# Altium PCB MainBoard V03.PcbDoc
Units mm, origin at the board's own origin, x right, y up, seen from the top; angles counter-clockwise.
Board outline 43 x 30 mm, 2 copper layers (Top Layer, Bottom Layer), stack 1.071 mm thick; 35 components, 48 nets, 166 pads, 86 vias.
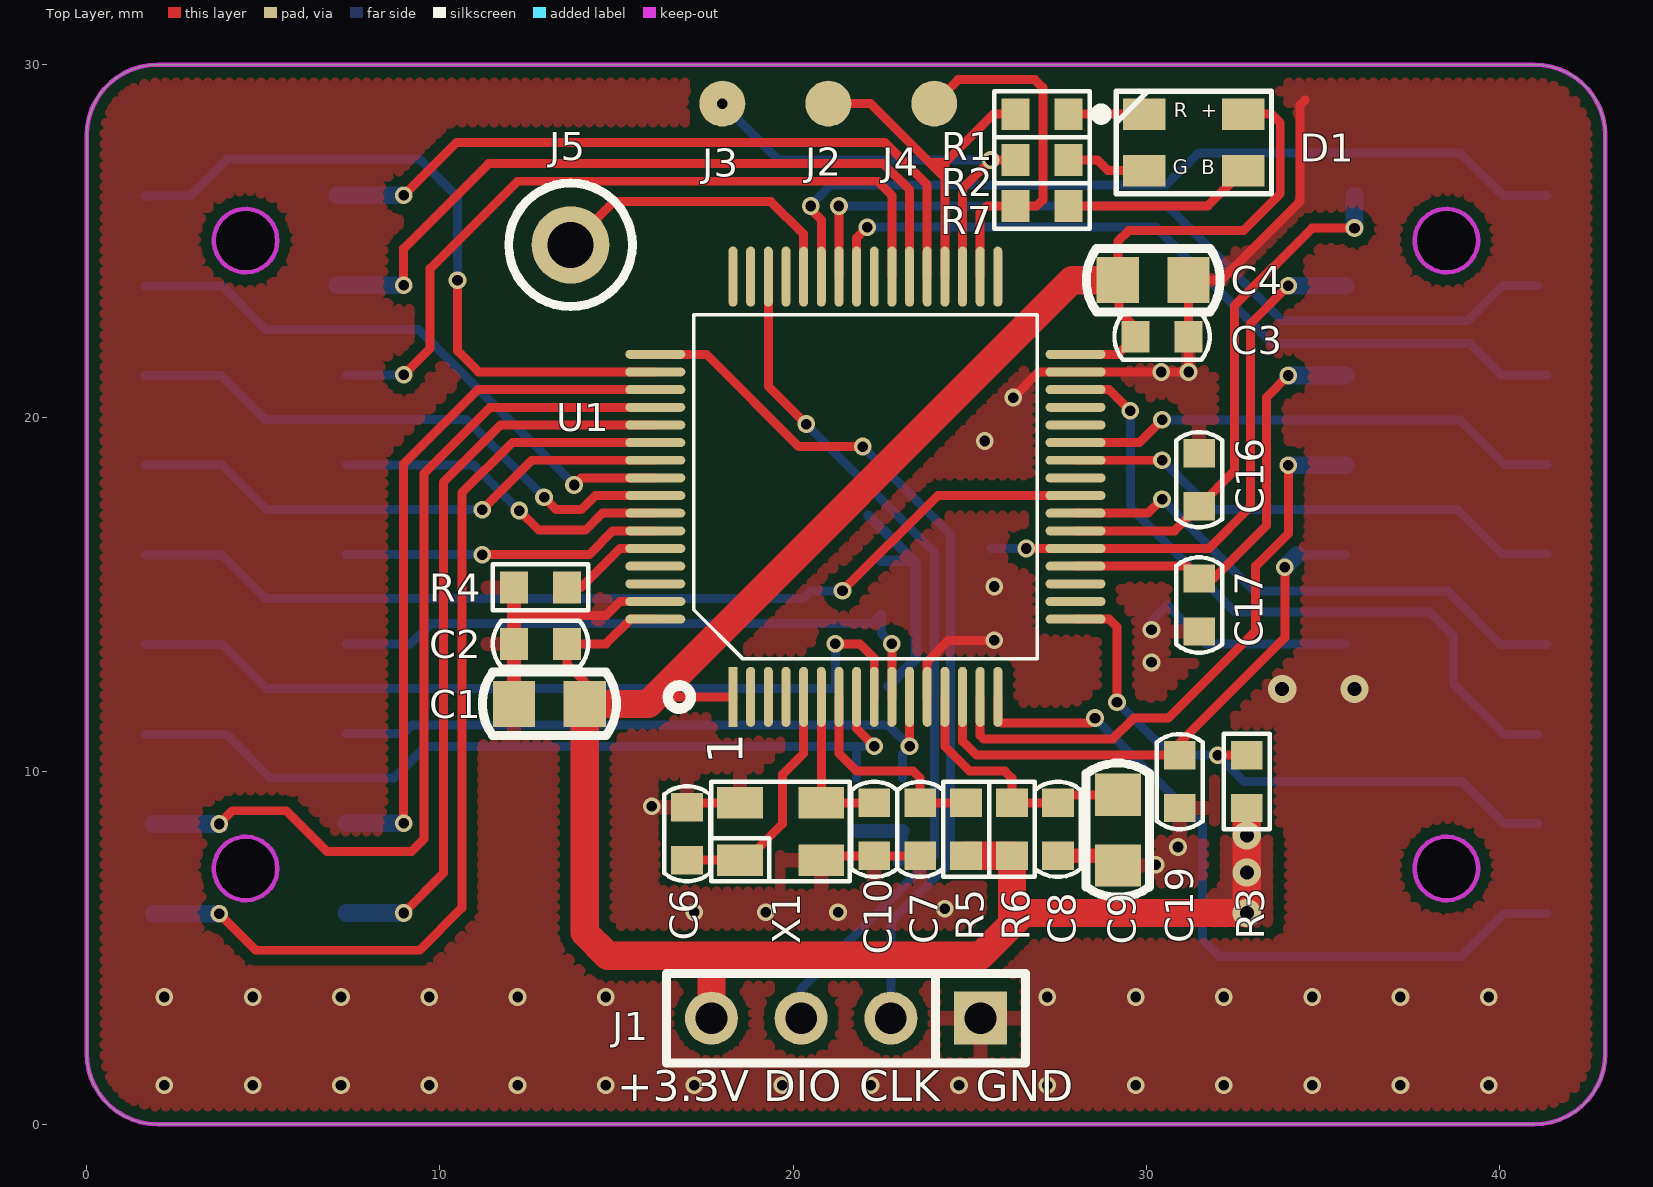
[diagram p0: Top Layer view]
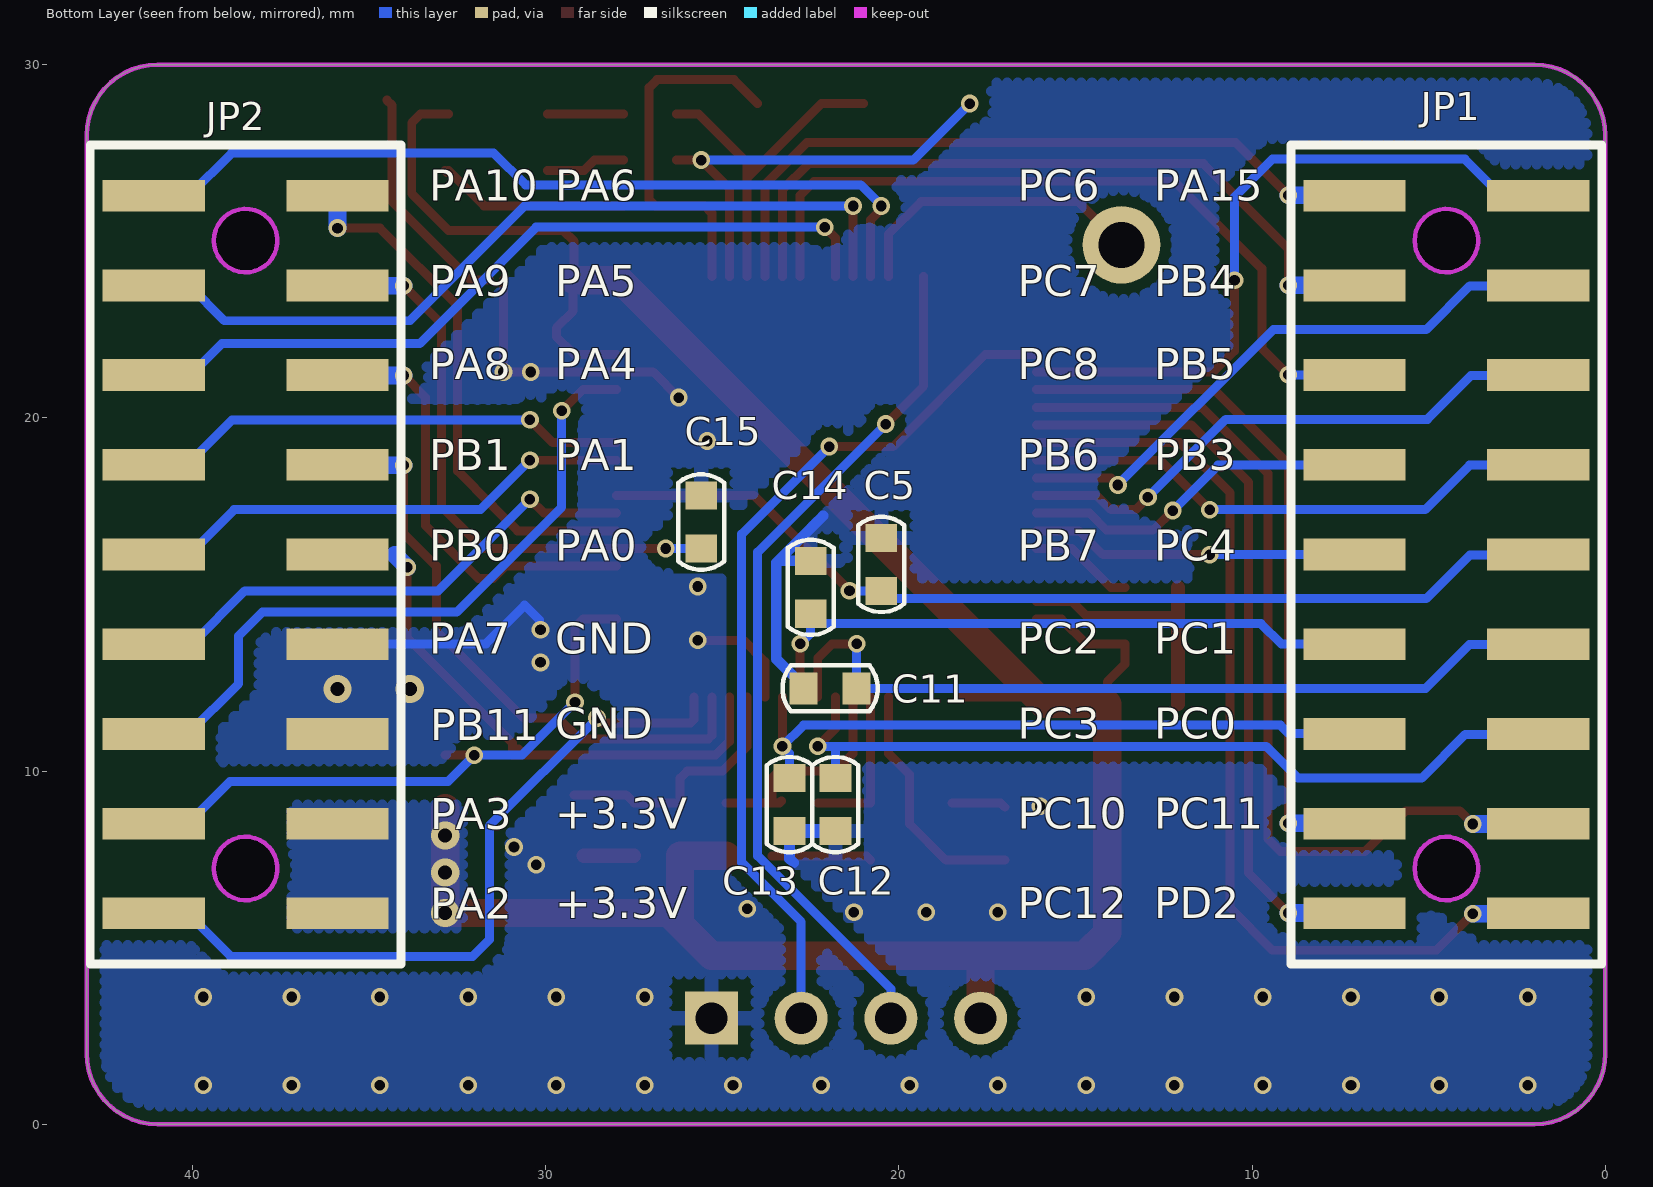
[diagram p1: Bottom Layer view, seen from below]

## Layer stack, top to bottom
Top Layer: signal copper 0.0356
Dielectric: core 1, FR-4, Dk 4.8
Bottom Layer: signal copper 0.0356

## Board outline
0,2 0,28 cw(c2,28) 2,30 41,30 cw(c41,28) 43,28 43,2 cw(c41,2) 41,0 2,0 cw(c2,2)

## Design rules (kind name [scope] priority, off if disabled: settings)
Clearance Clearance_1 [InPolygon] p1: gap=0.3
Clearance [All] p2: gap=0.2
ComponentClearance [All] p1 off: gap=0.254 collisioncheckmode=3 verticalgap=0.254 showdistances=FALSE
Height [All] p1 off: minheight=0 maxheight=25.4 prefheight=12.7
HoleToHoleClearance [All] p1 off: gap=0.254 allowstackedmicrovias=TRUE
LayerPairs [All] p1 off: enforce=TRUE
MinimumSolderMaskSliver [All] p1 off: minsoldermaskwidth=0.254
NetAntennae [All] p1 off: netantennaetolerance=0
PolygonConnect PolygonConnect_1 [(HasFootprint('0603C') OR HasFootprint('0603R') OR HasFootprint('0805C') OR HasFootprint('HEADER 9X2-MIRROR') OR HasFootprint('LQFP-64') OR HasFootprint('SIP4') OR HasFootprint('Y3225'))] p1: connectstyle=Relief reliefconductorwidth=0.4 reliefentries=4 polygonreliefangle="90 Angle" airgapwidth=0.35
PolygonConnect [All] p2: connectstyle=Direct reliefconductorwidth=0.254 reliefentries=4 polygonreliefangle="90 Angle" airgapwidth=0.254
RoutingVias [All] p1: holewidth=0.3 width=0.5 viastyle="Through Hole" minholewidth=0.3 minwidth=0.5 maxholewidth=0.711 maxwidth=1.27
SilkToSilkClearance [All] p1 off: silktosilkclearance=0.254
SilkToSolderMaskClearance [IsPad] p1 off: minsilkscreentomaskgap=0.254 clearancetoexposedcopper=TRUE
SolderMaskExpansion [All] p1: expansion=0.102
Width [All] p1: maxlimit=2 minlimit=0.2 preferedwidth=0.2
20 further rules are at their usual default settings.

## Components (designator, comment, footprint, x,y, rotation, side; value= is the part's Value field where it differs from the comment)
C1 "4.7UF" 0805C 13.1,11.9 r180 top
C2 "100NF" 0603C 12.85,13.6 r180 top
C3 "100NF" 0603C 30.45,22.3 r0 top
C4 "4.7UF" 0805C 30.2,23.9 r0 top
C5 "NC" 0603C 20.5,15.85 r90 bottom
C6 "12pF" 0603C 17,8.224 r270 top
C7 "100NF" 0603C 23.6,8.35 r90 top
C8 "100NF" 0603C 27.5,8.35 r270 top
C9 "4.7UF" 0805C 29.2,8.325 r270 top
C10 "12pF" 0603C 22.3,8.35 r90 top
C11 "NC" 0603C 21.95,12.34 r0 bottom
C12 "NC" 0603C 21.8,9.05 r270 bottom
C13 "1NF" 0603C 23.1,9.05 r270 bottom
C14 "NC" 0603C 22.5,15.2 r90 bottom
C15 "NC" 0603C 25.6,17.05 r90 bottom
C16 "NC" 0603C 31.5,18.25 r90 top
C17 "NC" 0603C 31.5,14.7 r270 top
C19 "NC" 0603C 30.95,9.7 r270 top
D1 "LED_3528" LED3528 31.35,27.8 r0 top
J1 "SWD" SIP4 25.31,3 r180 top
J2 "" TPJ1.3A 21,28.9 r0 top
J3 "" TPJ1.3A 18,28.9 r0 top
J4 "" TPJ1.3A 24,28.9 r0 top
J5 "" PLUG 13.7,24.9 r0 top
JP1 "HEADER 9X2" SMT2.54-2X9-M-MIRROR 4.5,16.13 r180 bottom
JP2 "HEADER 9X2" SMT2.54-2X9-M-MIRROR 38.5,16.13 r180 bottom locked
R1 "1K" 0603R 27.05,28.6 r180 top
R2 "1K" 0603R 27.05,27.3 r180 top
R3 "10K" 0603R 32.85,9.7 r270 top
R4 "10K" 0603R 12.85,15.2 r180 top
R5 "10K" 0603R 24.9,8.35 r270 top
R6 "51R" 0603R 26.2,8.35 r90 top
R7 "1K" 0603R 27.05,26 r180 top
U1 "STM32F051R8T6" LQFP-64 18.3,12.1 r90 top
X1 "16MHz" Y3225 18.5,7.474 r90 top

## Footprints (in the part's own frame and the unit in brackets; to place one, negate y for a bottom-side part, rotate by r counter-clockwise, add the part's x,y. Pads: shape width x height; smd on the part's side, far side on the other; paste and mask are expansions set on the pad)
0603C [mm]
  rect 0.8x0.9 smd: 1(-0.75,0) 2(0.75,0)
  silkscreen extent -1.35,-0.65 1.35,0.65, body extent -0.8,-0.4 0.8,0.4, height 0.3
0603R [mm]
  rect 0.8x0.9 smd: 1(-0.75,0) 2(0.75,0)
  silkscreen extent -1.35,-0.65 1.35,0.65, body extent -0.8,-0.4 0.8,0.4, height 0.45
0805C [mm]
  rect 1.2x1.3 smd: 1(-1,0) 2(1,0)
  silkscreen extent -1.9,-0.9 1.9,0.9, body extent -1,-0.62 1,0.63, height 0.78
LED3528 [mm]
  rect 1.2x0.9 smd: 1(-1.4,0.8) 2(1.4,0.8) 3(1.4,-0.8) 4(-1.4,-0.8)
  silkscreen extent -2.72,-1.45 2.2,1.45, body extent -1.5,-1.25 1.5,1.25, height 1.1
LQFP-64 [mm]
  rect 1.7x0.254 smd: 1(0,0)
  oval 1.7x0.254 smd: 2(0,-0.5) 3(0,-1) 4(0,-1.5) 5(0,-2) 6(0,-2.5) 7(0,-3) 8(0,-3.5) 9(0,-4) 10(0,-4.5) 11(0,-5) 12(0,-5.5) 13(0,-6) 14(0,-6.5) 15(0,-7) 16(0,-7.5) 33(11.9,-7.5) 34(11.9,-7) 35(11.9,-6.5) 36(11.9,-6) 37(11.9,-5.5) 38(11.9,-5) 39(11.9,-4.5) 40(11.9,-4) 41(11.9,-3.5) 42(11.9,-3) 43(11.9,-2.5) 44(11.9,-2) 45(11.9,-1.5) 46(11.9,-1) 47(11.9,-0.5) 48(11.9,0)
  oval 0.254x1.7 smd: 17(2.2,-9.7) 18(2.7,-9.7) 19(3.2,-9.7) 20(3.7,-9.7) 21(4.2,-9.7) 22(4.7,-9.7) 23(5.2,-9.7) 24(5.7,-9.7) 25(6.2,-9.7) 26(6.7,-9.7) 27(7.2,-9.7) 28(7.7,-9.7) 29(8.2,-9.7) 30(8.7,-9.7) 31(9.2,-9.7) 32(9.7,-9.7) 49(9.7,2.2) 50(9.2,2.2) 51(8.7,2.2) 52(8.2,2.2) 53(7.7,2.2) 54(7.2,2.2) 55(6.7,2.2) 56(6.2,2.2) 57(5.7,2.2) 58(5.2,2.2) 59(4.7,2.2) 60(4.2,2.2) 61(3.7,2.2) 62(3.2,2.2) 63(2.7,2.2) 64(2.2,2.2)
  silkscreen extent 1.09,-8.61 10.81,1.12, body extent -0.04,-9.76 11.96,2.24, height 1.56
PLUG [mm]
  round 2.2 hole 1.3: 1(0,0)
  silkscreen extent -1.75,-1.75 1.75,1.75, body extent -1.28,-1.27 1.26,1.27, height 4.89
SIP4 [mm]
  rect 1.5x1.5 hole 0.9: 1(0,0)
  round 1.5 hole 0.9: 2(2.54,0) 3(5.08,0) 4(7.62,0)
  silkscreen extent -1.27,-1.27 8.89,1.27, body extent -1.27,-1.27 8.89,1.27, height 8.54
SMT2.54-2X9-M-MIRROR [mm]
  rect 2.9x0.9 smd: 1(2.6,10.16) 2(-2.6,10.16) 3(2.6,7.62) 4(-2.6,7.62) 5(2.6,5.08) 6(-2.6,5.08) 7(2.6,2.54) 8(-2.6,2.54) 9(2.6,0) 10(-2.6,0) 11(2.6,-2.54) 12(-2.6,-2.54) 13(2.6,-5.08) 14(-2.6,-5.08) 15(2.6,-7.62) 16(-2.6,-7.62) 17(2.6,-10.16) 18(-2.6,-10.16)
  Keep-Out Layer circle w0.127: c0,-8.89 r0.9
  Keep-Out Layer circle w0.127: c0,8.89 r0.9
  Keep-Out Layer board cut-out: -0.9,-8.89 -0.831,-9.234 -0.636,-9.526 -0.344,-9.721 0,-9.79 0,-9.79 0.344,-9.721 0.636,-9.526 0.831,-9.234 0.9,-8.89 0.9,-8.89 0.831,-8.546 0.636,-8.254 0.344,-8.059 0,-7.99 0,-7.99 -0.344,-8.059 -0.636,-8.254 -0.831,-8.546 -0.9,-8.89
  Keep-Out Layer board cut-out: -0.9,8.89 -0.779,9.34 -0.45,9.669 0,9.79 0,9.79 0.344,9.721 0.636,9.526 0.831,9.234 0.9,8.89 0.9,8.89 0.831,8.546 0.636,8.254 0.344,8.059 0,7.99 0,7.99 -0.344,8.059 -0.636,8.254 -0.831,8.546 -0.9,8.89
  silkscreen extent -4.4,-11.6 4.4,11.6, body extent -3.57,-11.48 3.43,11.38, height 9.66
TPJ1.3A [mm]
  round 1.3 smd: 1(0,0)
Y3225 [mm]
  rect 0.9x1.3 smd: 1(0,0) 2(0,-2.3) 3(1.626,-2.3) 4(1.626,0)
  silkscreen extent -0.6,-3.11 2.23,0.81, body extent -0.42,-2.75 2.08,0.45, height 0.81

## Part data
C1 C4: library part "CAP NP"
C2 C3 C5 C8 C9 C11 C12 C13 C14 C15 C16 C17 C19: library part CAP, "Y02-02238"
C6 C10: library part CAP, "Capacitor"
C7: library part "CAP NP", "Y02-02238"
J1: library part CON4, "Connector"
J2 J3 J4 J5: library part Socket, "Plug"
R1 R2 R7: library part RES, "Y02-00493"
R3: library part RES
R4 R5 R6: library part RES, "Y02-01715"
X1: library part CON4A_1

## Via types
v1: diameter 0.5, hole 0.3, Top Layer to Bottom Layer, tented both sides, 81 vias
v2: diameter 0.8, hole 0.4, Top Layer to Bottom Layer, tented both sides, 5 vias

## Nets (pads, with @x,y where several pads share a name; then routed paths per layer and width w, separated by ;. In a path a pad name is that pad's centre, name@x,y a point inside that pad or via, vN(x,y) a via of type N, cw(c..) or ccw(c..) an arc to the next point about the centre after c; other vN are vias at no path point)
+3.3V: C1.1 C2.1 C3.1 C4.1 D1.2 J1.4 JP2.15 JP2.17 R3.2 R5.2 R6.1 U1.1 U1.32 U1.64 | length 74.1
  Top Layer w0.254: C1.1 14.1,12.525 13.6,13.025 C2.1 14.7,13.6 15.4,14.3 U1.64 ; 16.1,12.1 U1.1 ; U1.32 29.2,21.8 C3.1 29.7,22.55 29.225,23.025 29.225,23.875 C4.1 29.2,25 29.5,25.3 32.75,25.3 33.796,26.346 33.796,28.354 33.55,28.6 D1.2
  Top Layer w0.8: J1.4 17.69,4.77 ; R5.2 R6.1 26.2,5.66 ; C4.1 27.9,23.9 15.9,11.9 C1.1 14.1,5.425 14.755,4.77 25.31,4.77 26.2,5.66 ; v2@32.85,5.97 R3.2 ; v2(32.85,5.98) 32.3,5.98 26.52,5.98 26.2,5.66
  other v2: 32.85,7.125 32.85,8.175
GND: C1.2 C2.2 C3.2 C4.2 C5.2 C6.1 C7.1 C8.2 C9.2 C10.1 C11.2 C12.2 C13.2 C14.2 C15.2 C16.2 C17.2 C19.2 J1.1 JP2.11 JP2.13 R4.2 U1.12 U1.31 U1.63 X1.2 X1.4 | length 47.2
  Top Layer w0.254: 12.1,14.4 14.7,14.4 15.1,14.8 U1.63 ; C6.1 17.126,9.1 X1.4 ; X1.2 20.926,7.6 C10.1 C7.1 ; U1.12 23.8,13.1 24.4,13.7 v1(25.7,13.7) ; v1(26.235,20.575) 26.96,21.3 U1.31 v1(31.2,21.3) ; C3.2 v1(31.2,21.3) ; C4.2 v1(31.2,21.3) ; C4.2@31.6,23.9 32.125,23.9 34.35,26.125 34.35,28.85 34.5,29
  Top Layer w0.4: C1.2 12.1,14.4 R4.2 ; C8.2 28.8,7.6 C9.2@28.925,7.6
  Bottom Layer w0.254: v1@30.175,14 30.175,14.275 30.6,14.7 31.7,13.6 JP2.11@35.65,13.6
  Bottom Layer w0.3: 22.149,17.224 23.473,15.9 23.473,13.173 C11.2@22.7,12.4 ; C14.2 23.423,15.95 ; 22.984,7.4 23.1,7.516 C13.2
  Bottom Layer w0.4: C12.2 C13.2
  other v1: 2.2,1.1 4.7,1.1 7.2,1.1 9.7,1.1 12.2,1.1 14.7,1.1 17.2,1.1 19.7,1.1 22.2,1.1 24.7,1.1 27.2,1.1 29.7,1.1 32.2,1.1 34.7,1.1 37.2,1.1 39.7,1.1 2.2,3.6 4.7,3.6 7.2,3.6 9.7,3.6 12.2,3.6 14.7,3.6 27.2,3.6 29.7,3.6 32.2,3.6 34.7,3.6 37.2,3.6 39.7,3.6 17.2,6 19.225,6 21.275,6 24.3,6.1 30.275,7.345 30.9,7.85 16,9 30.15,13.075 30.15,14 25.7,15.225 25.425,19.345 30.425,21.3
  other v2: 33.85,12.325 35.9,12.325
NetC6_2: C6.2 U1.5 X1.1 | length 7
  Top Layer w0.254: C6.2 X1.1 18.674,7.474 19.7,8.5 19.7,9.9 20.3,10.5 U1.5
NetC7_2: C7.2 R5.1 U1.7 | length 6.5
  Top Layer w0.254: U1.7 21.3,10.5 21.8,10 23.4,10 23.6,9.8 C7.2 ; C7.2@23.332,9.153 23.385,9.1 C7.2 ; R5.1 C7.2
NetC8_1: C8.1 C9.1 R6.2 U1.13 | length 7.8
  Top Layer w0.254: U1.13 24.3,10.7 25,10 26,10 26.2,9.8 R6.2 C8.1 ; C9.1 C8.1@27.725,9.325 ; C8.1 C8.1@27.725,9.325 ; C8.1 C8.1@27.725,9.325
NetC10_2: C10.2 U1.6 X1.3 | length 4.5
  Top Layer w0.254: U1.6 X1.3 C10.2
NetD1_1: D1.1 R1.1 | length 2.1
  Top Layer w0.254: R1.1 D1.1
NetD1_3: D1.3 R7.1 | length 5.4
  Top Layer w0.254: R7.1 31.75,26 D1.3 ; D1.3@32.8,26.95 D1.3@32.85,27
NetD1_4: D1.4 R2.1 | length 2.3
  Top Layer w0.254: R2.1 28.625,27.3 28.925,27 D1.4
NetJ2_1: J2.1 R1.2 U1.36 | length 10.4
  Top Layer w0.254: J2.1 22.2,28.9 23.875,27.225 ; U1.36 24.3,27.225 ; 24.3,26.8 23.875,27.225 ; R1.2 25.675,28.6 24.3,27.225 ; 23.875,27.225 24.3,27.225
NetJ3_1: J3.1 R2.2 U1.35 | length 12.6
  Top Layer w0.254: U1.35 24.8,26.5 v1(25.6,27.3) R2.2
  Bottom Layer w0.254: v1(18,28.9) 19.6,27.3 v1(25.6,27.3)
NetJ4_1: J4.1 R7.2 U1.34 | length 10.4
  Top Layer w0.254: J4.1 24.675,29.575 26.85,29.575 27.073,29.352 27.073,26.173 26.9,26 R7.2 25.5,26 25.3,25.8 U1.34
NetJ5_1: J5.1 U1.44 | length 8.7
  Top Layer w0.254: J5.1 14.925,26.125 19.375,26.125 20.3,25.2 U1.44
NetR4_1: R4.1 U1.60 | length 3
  Top Layer w0.254: R4.1 14,15.2 15.1,16.3 U1.60
PA0/W_EMF: C19.1 JP2.9 U1.14 | length 16.2
  Top Layer w0.254: U1.14 24.8,10.842 25.188,10.454 C19.1@30.604,10.454 ; C19.1@30.775,10.625 C19.1@30.604,10.454 ; v1(33.925,15.77) 33.925,13.775 30.95,10.8 C19.1 30.946,10.454 C19.1@30.604,10.454
  Bottom Layer w0.254: 34.275,16.12 JP2.9@35.65,16.12
  Bottom Layer w0.5: v1(33.925,15.77) 34.275,16.12
PA1/STAR: JP2.7 U1.15 | length 16.9
  Top Layer w0.254: U1.15 25.3,11.008 25.4,10.908 29.058,10.908 29.65,11.5 30.625,11.5 33.1,13.975 33.1,15.8 34.025,16.725 v1(34.025,18.66)
  Bottom Layer w0.5: v1(34.025,18.66) JP2.7@35.65,18.66
PA2/USART2_TX: JP2.18 U1.16 | length 21.5
  Top Layer w0.254: U1.16 25.8,11.462 25.9,11.362 28.412,11.362 v1(28.55,11.5)
  Bottom Layer w0.254: v1(28.55,11.5) 31.6,8.45 31.6,5.225 32.075,4.75 38.925,4.75 40.145,5.97 JP2.18 ; JP2.18@41.1,5.96 JP2.18@41.35,5.96
PA3/USART2_RX: JP2.16 R3.1 U1.17 | length 17.6
  Top Layer w0.254: U1.17 28.95,14.3 29.175,14.075 v1(29.175,11.95) ; v1(32.025,10.45) R3.1
  Bottom Layer w0.254: v1(29.175,11.95) 30.675,10.45 v1(32.025,10.45) 32.775,9.7 38.95,9.7 40.14,8.51 JP2.16
PA4/V_EMF: C17.1 JP2.5 U1.20 | length 12.3
  Top Layer w0.254: U1.20 31.15,15.8 C17.1 31.9,15.45 33.408,16.958 33.408,20.583 v1(34.025,21.2)
  Bottom Layer w0.5: v1(34.025,21.2) JP2.5@35.65,21.2
PA5/U_EMF: C15.1 JP2.3 U1.21 | length 16.2
  Top Layer w0.254: v1(26.6,16.3) U1.21 31.775,16.3 32.954,17.479 32.954,22.669 v1(34.025,23.74)
  Bottom Layer w0.254: C15.1 v1(26.6,16.3)
  Bottom Layer w0.5: v1(34.025,23.74) JP2.3@35.65,23.74
PA6/VIN_AD: C16.1 JP2.1 U1.22 | length 15.1
  Top Layer w0.254: U1.22 30.8,16.8 C16.1 32.5,18.5 32.5,23.175 34.7,25.375 v1(35.9,25.375)
  Bottom Layer w0.5: v1(35.9,25.375) JP2.1
PA7/U-: JP2.12 U1.23 | length 15.2
  Top Layer w0.254: U1.23 30.05,17.3 v1(30.45,17.7)
  Bottom Layer w0.254: v1(30.45,17.7) 33.05,15.1 38.525,15.1 40.045,13.58 JP2.12@41.35,13.58
PA8/U+: JP2.6 U1.41 | length 22.5
  Top Layer w0.254: U1.41 21.8,25.1 v1(22.1,25.4)
  Bottom Layer w0.254: v1(22.1,25.4) 30.275,25.4 33.575,22.1 39.175,22.1 40.055,21.22 JP2.6@41.35,21.22
PA9/V+: JP2.4 U1.42 | length 23.6
  Top Layer w0.254: U1.42 v1(21.3,26)
  Bottom Layer w0.254: v1(21.3,26) 30.6,26 33.85,22.75 39.1,22.75 40.1,23.75 JP2.4
PA10/W+: JP2.2 U1.43 | length 24.1
  Top Layer w0.254: v1(20.5,26) 20.5,25.907 20.8,25.607 U1.43
  Bottom Layer w0.254: v1(20.5,26) 20.5,26.016 21.084,26.6 30.575,26.6 31.475,27.5 38.9,27.5 40.1,26.3 JP2.2@41.35,26.3
PA15/SPI_NSS: JP1.1 U1.50 | length 19.9
  Top Layer w0.254: v1(10.5,23.9) 10.5,21.9 11.1,21.3 U1.50
  Bottom Layer w0.254: JP1.1@1.65,26.28 JP1.1@1.9,26.28 ; JP1.1 2.94,26.29 3.975,27.325 9.425,27.325 10.5,26.25 v1(10.5,23.9)
PB0/V-: JP2.10 U1.26 | length 14.5
  Top Layer w0.254: U1.26 v1(30.45,18.8)
  Bottom Layer w0.254: v1(30.45,18.8) 31.85,17.4 38.825,17.4 40.085,16.14 JP2.10@41.35,16.14
PB1/W-: JP2.8 U1.27 | length 14.1
  Top Layer w0.254: U1.27 29.8,19.3 v1(30.45,19.95)
  Bottom Layer w0.254: v1(30.45,19.95) 30.46,19.94 38.885,19.94 40.145,18.68 JP2.8@41.35,18.68
PB3/SPI_CLK: JP1.7 U1.55 | length 15.6
  Top Layer w0.254: v1(11.2,17.4) 12.6,18.8 U1.55
  Bottom Layer w0.254: JP1.7@1.65,18.66 3.84,18.66 5.1,17.4 v1(11.2,17.4)
PB4/SPI_MISO: JP1.3 U1.56 | length 16.9
  Top Layer w0.254: v1(13.8,18.1) 14,18.3 U1.56
  Bottom Layer w0.254: JP1.3@1.65,23.74 3.835,23.74 5.075,22.5 9.4,22.5 v1(13.8,18.1)
PB5/SPI_MOSI: JP1.5 U1.57 | length 16.2
  Top Layer w0.254: v1(12.95,17.75) 13.3,17.4 14,17.4 14.4,17.8 U1.57
  Bottom Layer w0.254: JP1.5@1.65,21.2 3.8,21.2 5.04,19.96 10.74,19.96 v1(12.95,17.75)
PB6/USART1_TX: JP1.8 U1.58 | length 9.7
  Top Layer w0.254: v1(12.25,17.375) 12.8,16.825 14.125,16.825 14.6,17.3 U1.58
  Bottom Layer w0.254: JP1.8@7.35,18.66 10.965,18.66 v1(12.25,17.375)
PB7/USART1_RX: JP1.10 U1.59 | length 9
  Top Layer w0.254: v1(11.2,16.125) 14.225,16.125 14.9,16.8 U1.59
  Bottom Layer w0.254: JP1.10@7.35,16.12 7.355,16.125 v1(11.2,16.125)
PB11/CTL_PWM: JP2.14 U1.30 | length 19.5
  Top Layer w0.254: U1.30 28.95,20.8 v1(29.55,20.2)
  Bottom Layer w0.254: v1(29.55,20.2) 29.55,17.475 32.525,14.5 38.025,14.5 38.7,13.825 38.7,12.475 40.135,11.04 JP2.14@41.1,11.04
PC0/BUS_CURR: C12.1 JP1.13 U1.8 | length 24.1
  Top Layer w0.254: U1.8 21.8,11.2 v1(22.3,10.7)
  Bottom Layer w0.254: JP1.13@1.65,11.04 3.96,11.04 5.2,9.8 8.7,9.8 9.6,10.7 21.7,10.7 ; C12.1 21.8,10.6 21.7,10.7 ; v1(22.3,10.7) 21.7,10.7
PC1/U_CURR: C11.1 JP1.11 U1.9 | length 23.6
  Top Layer w0.254: v1(21.2,13.6) 21.893,13.6 22.293,13.2 ; U1.9 22.3,13.2
  Bottom Layer w0.254: JP1.11@1.65,13.58 3.845,13.58 5.085,12.34 C11.1 ; C11.1@21.2,12.375 v1(21.2,13.6)
PC2/V_CURR: C14.1 JP1.12 U1.10 | length 18.3
  Top Layer w0.254: U1.10 v1(22.8,13.6)
  Bottom Layer w0.254: JP1.12@7.35,13.6 9.175,13.6 9.752,14.177 C14.1@22.227,14.177 ; v1(22.8,13.6) 22.5,13.9 C14.1@22.5,14.2 ; C14.1@22.227,14.177 22.477,14.177 C14.1@22.5,14.2 ; C14.1@22.227,14.177 C14.1 C14.1@22.5,14.2
PC3/SUM_CURR: C13.1 JP1.14 U1.11 | length 18.7
  Top Layer w0.254: v1(23.3,10.7) U1.11
  Bottom Layer w0.254: JP1.14@7.35,11.06 8.96,11.06 9.2,11.3 22.7,11.3 v1(23.3,10.7) 23.1,10.5 C13.1
PC4/CTL_AD: C5.1 JP1.9 U1.24 | length 28.1
  Top Layer w0.254: v1(21.4,15.1) 24.1,17.8 U1.24
  Bottom Layer w0.254: JP1.9@1.65,16.12 3.83,16.12 5.07,14.88 20.28,14.88 C5.1 v1(21.4,15.1)
PC6/HALL_C: JP1.2 U1.37 | length 20.4
  Top Layer w0.254: v1(8.975,26.3) 10.475,27.8 22.6,27.8 23.8,26.6 U1.37
  Bottom Layer w0.5: JP1.2@7.1,26.3 v1(8.975,26.3)
PC7/HALL_B: JP1.4 U1.38 | length 21
  Top Layer w0.254: v1(8.975,23.76) 8.975,24.795 11.38,27.2 22.558,27.2 23.3,26.458 U1.38
  Bottom Layer w0.5: JP1.4@7.1,23.76 v1(8.975,23.76)
PC8/HALL_A: JP1.6 U1.39 | length 21.5
  Top Layer w0.254: v1(8.975,21.22) 9.725,21.97 9.725,24.225 12.2,26.7 22.4,26.7 22.8,26.3 U1.39
  Bottom Layer w0.254: JP1.6@7.35,21.22 v1(8.975,21.22)
PC10/KEY1: JP1.16 U1.51 | length 19.8
  Top Layer w0.254: v1(8.975,8.52) 8.975,18.7 11.075,20.8 U1.51
  Bottom Layer w0.5: JP1.16@7.35,8.52 v1(8.975,8.52)
PC11/KEY2: JP1.15 U1.52 | length 26.1
  Top Layer w0.254: v1(3.75,8.5) 4.125,8.875 5.65,8.875 6.8,7.725 9.2,7.725 9.552,8.077 9.552,18.427 11.425,20.3 U1.52
  Bottom Layer w0.5: JP1.15@1.9,8.5 v1(3.75,8.5)
PC12/KEY3: JP1.18 U1.53 | length 21
  Top Layer w0.254: v1(8.975,5.98) 10.1,7.105 10.1,18.175 11.725,19.8 U1.53
  Bottom Layer w0.5: JP1.18@7.35,5.98 v1(8.975,5.98)
PD2/KEY4: JP1.17 U1.54 | length 27.5
  Top Layer w0.254: v1(3.75,5.96) 4.785,4.925 9.425,4.925 10.625,6.125 10.625,6.988 10.623,6.99 10.623,17.873 12.05,19.3 U1.54
  Bottom Layer w0.5: JP1.17@1.9,5.96 v1(3.75,5.96)
SWCLK: J1.2 U1.49 | length 24.9
  Top Layer w0.254: U1.49 17.55,21.8 20.163,19.187 v1(21.975,19.187)
  Bottom Layer w0.254: v1(21.975,19.187) 24.454,16.708 24.454,7.412 22.77,5.728 J1.2
SWDIO: J1.3 U1.46 | length 24.5
  Top Layer w0.254: U1.46 19.3,20.9 v1(20.375,19.825)
  Bottom Layer w0.254: J1.3 20.23,3.83 24,7.6 24,16.2 v1(20.375,19.825)
pads on no net: U1.2 U1.3 U1.4 U1.18 U1.19 U1.25 U1.28 U1.29 U1.33 U1.40 U1.45 U1.47 U1.48 U1.61 U1.62

## Polygon pours and split planes (outlines as drawn)
GND on Bottom Layer "Top-GND4" (hatched 90Degree grid 0.3 track 0.3, remove dead copper, pour order 2): 0,2 0,28 cw(c2,28) 2,30 41,30 cw(c41,28) 43,28 43,2 cw(c41,2) 41,0 2,0 cw(c2,2)
+3.3V on Bottom Layer "Top Layer-No Net 1" (hatched 90Degree grid 0.3 track 0.3, pour order 4): 32.35,9.05 37.2,9.05 37.2,5.55 32.35,5.55
+3.3V on Top Layer "Top Layer-No Net 1" (hatched 90Degree grid 0.3 track 0.3, pour order 6): 31.3,5.9 32.225,6.825 32.225,9.825 33.3,9.825 33.45,9.675 33.45,5.725 31.3,5.725
GND on Top Layer "Top Layer-No Net 1" (hatched 90Degree grid 0.3 track 0.3, remove dead copper, pour order 9): 0.187,2.055 0.187,28.055 cw(c2.187,28.055) 2.187,30.055 40.787,30.055 cw(c40.787,28.055) 42.787,28.055 42.787,2.055 cw(c40.787,2.055) 40.787,0.055 2.187,0.055 cw(c2.187,2.055)

## Keep-outs
Keep-Out Layer:
  the board outline again, w0.127

## Other copper
Bottom Layer:
  pour cut-out: 39.6,10.85 39.2,10.85 39.2,9.55 39.6,9.55
  pour cut-out: 10.675,23.575 10.275,23.575 10.275,21.25 10.675,21.25

## Silkscreen, mask and mechanical layers (free items; w line width, h text height)
Top Overlay:
  circle w0.3: c16.779,12.095 r0.326
  text "1" at 18.579,10.196 h1 r90
  text "+3.3V" at 15.025,0.35 h1.5
  text "DIO" at 19.15,0.35 h1.5
  text "CLK" at 21.875,0.35 h1.5
  text "GND" at 25.175,0.35 h1.5
Bottom Overlay:
  text "PA15" at 12.775,25.85 h1.5
  text "PC6" at 16.635,25.85 h1.5
  text "PA6" at 29.735,25.85 h1.5
  text "PA10" at 33.295,25.85 h1.5
  text "PB4" at 12.775,23.15 h1.5
  text "PC7" at 16.635,23.15 h1.5
  text "PA5" at 29.735,23.15 h1.5
  text "PA9" at 33.295,23.15 h1.5
  text "PB5" at 12.775,20.8 h1.5
  text "PC8" at 16.635,20.8 h1.5
  text "PA4" at 29.735,20.8 h1.5
  text "PA8" at 33.295,20.8 h1.5
  text "PB3" at 12.775,18.225 h1.5
  text "PB6" at 16.635,18.225 h1.5
  text "PA1" at 29.735,18.225 h1.5
  text "PB1" at 33.295,18.225 h1.5
  text "PC4" at 12.775,15.65 h1.5
  text "PB7" at 16.635,15.65 h1.5
  text "PA0" at 29.735,15.65 h1.5
  text "PB0" at 33.295,15.65 h1.5
  text "PC1" at 12.775,13.025 h1.5
  text "PC2" at 16.635,13.025 h1.5
  text "GND" at 29.735,13.025 h1.5
  text "PA7" at 33.295,13.025 h1.5
  text "PC0" at 12.775,10.61 h1.5
  text "PC3" at 16.635,10.61 h1.5
  text "GND" at 29.735,10.61 h1.5
  text "PB11" at 33.275,10.575 h1.5
  text "PC11" at 12.775,8.07 h1.5
  text "PC10" at 16.635,8.07 h1.5
  text "+3.3V" at 29.735,8.07 h1.5
  text "PA3" at 33.275,8.05 h1.5
  text "PD2" at 12.775,5.53 h1.5
  text "PC12" at 16.635,5.53 h1.5
  text "+3.3V" at 29.735,5.53 h1.5
  text "PA2" at 33.275,5.525 h1.5

## Text inside footprints (layer, text, board x,y; h text height)
D1: Top Overlay "R  +" at 30.775,28.375 h0.7; Top Overlay "G  B" at 30.75,26.75 h0.7